# Altium PCB PCB12.PCBDOC
Units mm, origin at the board's own origin, x right, y up, seen from the top; angles counter-clockwise.
Board outline 152.4 x 101.6 mm, 2 copper layers (Top Layer, Bottom Layer); 23 components, 35 nets, 129 pads, 249 vias.
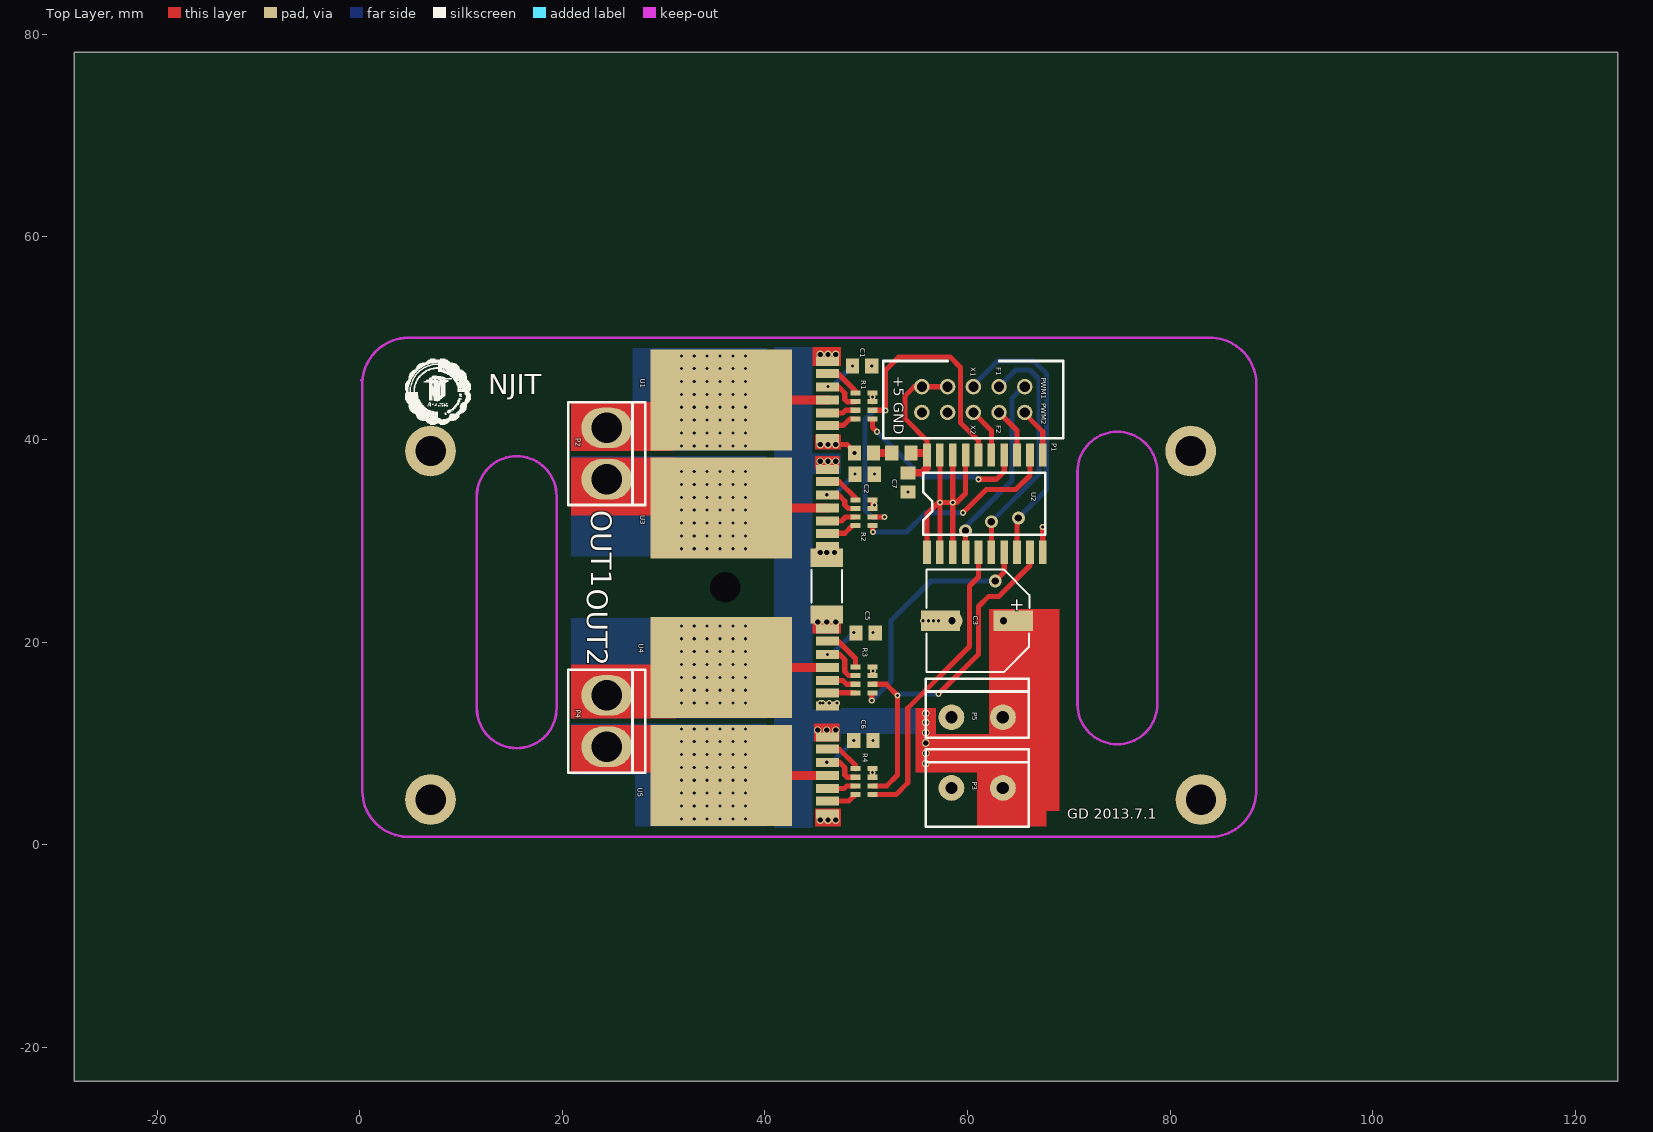
[diagram p0: Top Layer view]
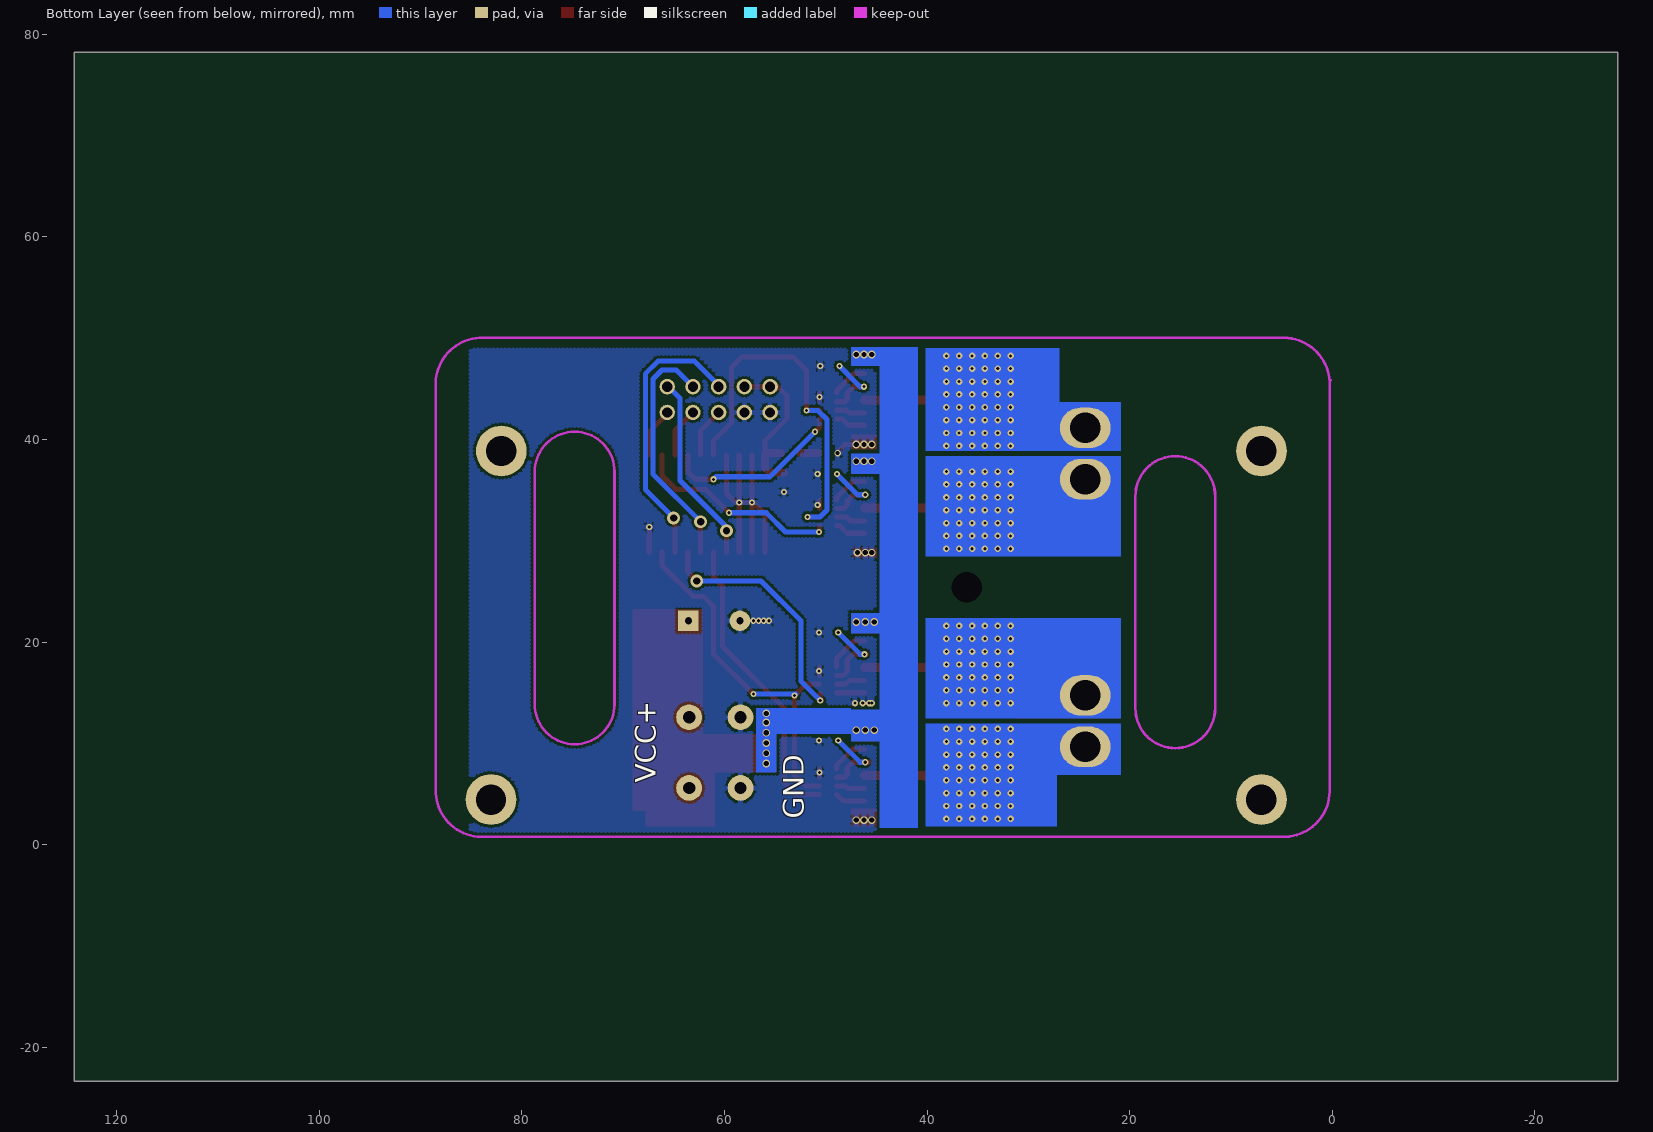
[diagram p1: Bottom Layer view, seen from below]

## Layer stack, top to bottom
Top Layer: signal copper 0.0356
Dielectric: dielectric 0.32, FR-4, Dk 4.8
Bottom Layer: signal copper 0.0356

## Board outline
-28.194,-23.368 124.206,-23.368 124.206,78.232 -28.194,78.232

## Design rules (kind name [scope] priority, off if disabled: settings)
Clearance [All] p1: gap=0.254
ComponentClearance [All] p1: gap=0.254 collisioncheckmode=3 verticalgap=0.254
PolygonConnect [All] p1: connectstyle=Relief reliefconductorwidth=0.508 reliefentries=4 polygonreliefangle="90 Angle"
RoutingVias [All] p1: holewidth=0.711 width=1.27 viastyle="Through Hole" minholewidth=0.305 minwidth=0.61 maxholewidth=12.7 maxwidth=127
SolderMaskExpansion [All] p1: expansion=0.102
TestPointUsage [All] p1: valid=0 allowmultiple=FALSE
Testpoint [All] p1: side=15 testpointundercomponent=TRUE minsize=1.016 maxsize=2.54 preferedsize=1.524 minholesize=0 maxholesize=1.016 preferedholesize=0.813 testpointgrid=0.025 style=1023 order=0-112345678
Width [All] p1: maxlimit=2539.975 minlimit=0.254 preferedwidth=0.508
18 further rules are at their usual default settings.

## Classes and differential pairs
component class motordriver: C1 C2 C3 C4 C5 C6 C7 C? P1 P2 P3 P4 R1 R2 R3 R4 U1 U2 U3 U4 U5

## Components (designator, comment, footprint, x,y, rotation, side; value= is the part's Value field where it differs from the comment)
C1 "104" M0805 50.546,47.244 r180 top
C2 "104" M0805 50.8,36.576 r180 top
C3 "Cap Pol1" C2 60.96,22.098 r90 top
C5 "104" M0805 50.902,20.904 r180 top
C6 "104" M0805 50.673,10.287 r180 top
C7 "104" M0805 54.127,36.703 r270 top
P1 "Header 5X2" ISP 65.659,45.212 r270 top
P2 "Header 2" 2P 24.384,38.608 r270 top
P3 "Header 2" 2p#1 60.96,5.588 r0 top
P4 "Header 2" 2p#2 24.384,12.192 r270 top
P5 "Header 2" 2p#1 60.96,12.573 r0 top (schematic designator P3)
R1 "A" 排阻 49.784,43.307 r90 top
R2 "A" 排阻 49.784,32.766 r90 top
R3 "A" 排阻 49.784,16.256 r90 top
R4 "A" 排阻 49.784,6.223 r90 top
U1 "bts7960" bts7960 41.148,39.624 r270 top
U2 "74ALS244B" 244 61.722,34.671 r0 top
U3 "bts7960" bts7960 41.148,28.956 r270 top
U4 "bts7960" bts7960 41.148,13.208 r270 top
U5 "bts7960" bts7960 41.148,2.54 r270 top
? "Comment" 6332[2512] 46.101,25.527 r270 top
? "Comment" 2012[0805] 49.784,38.659 r0 top
? "Comment" 2012[0805] 53.467,38.659 r0 top

## Footprints (in the part's own frame and the unit in brackets; to place one, negate y for a bottom-side part, rotate by r counter-clockwise, add the part's x,y. Pads: shape width x height; smd on the part's side, far side on the other; paste and mask are expansions set on the pad)
2P [mm]
  oval 4x5 hole 3: 1(-2.54,0) 2(2.54,0)
  silkscreen extent -5.08,-3.81 5.08,3.81
2p#1 [mil]
  round 100 hole 48: 1(-100,0) 2(100,0)
  silkscreen extent -200,-150 200,150
2p#2 [mil]
  oval 157.48x196.85 hole 118.11: 1(-100,0) 2(100,0)
  silkscreen extent -200,-150 200,150
244 [mil]
  rect 30x90 smd: 1(-225,-228.74) 2(-175,-228.74) 3(-125,-228.74) 4(-75,-228.74) 5(-25,-228.74) 6(25,-228.74) 7(75,-228.74) 8(125,-228.74) 9(175,-228.74) 10(225,-228.74) 11(225,150) 12(175,150) 13(125,150) 14(75,150) 15(25,150) 16(-25,150) 17(-75,150) 18(-125,150) 19(-175,150) 20(-225,150)
2012[0805] [mm] "Chip Resistor; Body 2.0 x 1.3 mm (LxW typ)"
  rect 1.3x1.5 smd: 1(-0.95,0) 2(0.95,0)
6332[2512] [mm] "Chip Resistor; Body 6.3 x 3.2 mm (LxW typ)"
  rect 1.8x3.2 smd: 1(-2.8,0) 2(2.8,0)
  silkscreen extent -1.6,-1.5 1.6,1.5
bts7960 [mil]
  rect 35x90 smd: 1(-18.9,198.11) 2(-70.08,198.11) 3(-117.32,198.11) 4(-168.5,198.11) 5(-219.68,198.11) 6(-270.87,198.11) 7(-318.11,198.11)
  rect 393.7x551.18 smd: 8(-168.5,-215.28)
C2 [mil]
  rect 80x80 hole 27.56: 1(0,-102.5)
  rect 80x150 smd: 1(0,-142.5) 2(0,142.5)
  round 80 hole 27.56: 2(0,97.5)
  silkscreen extent -200,-202 200,198
ISP [mil]
  round 60 hole 39.37: 1(0,0) 2(100,0) 3(0,-100) 4(100,-100) 5(0,-200) 6(100,-200) 7(0,-300) 8(100,-300) 9(0,-400) 10(100,-400)
  silkscreen extent -100,-550 200,150
M0805 [mm]
  rect 1.3x1.5 smd: 1(0,0) 2(1.9,0)
排阻 [mm]
  rect 0.5x1 smd: 1(-1.27,-0.847) 2(-1.27,0.847) 3(-0.423,-0.847) 4(-0.423,0.847) 5(0.423,-0.847) 6(0.423,0.847) 7(1.27,-0.847) 8(1.27,0.847)

## Part data
C1 C2 C5 C6 C7: library part Cap, "Capacitor"
C3: "Polarized Capacitor (Radial)"
P1: "Header, 5-Pin, Dual row"
P2 P3 P4 P5: "Header, 2-Pin"
R1 R2 R3 R4: library part R1

## Free pads (board coordinates)
  round 5 hole 3: 0(6.985,38.862) 1(82.042,38.862) 5(6.985,4.445) 6(83.058,4.445)
  round 5 on Top Overlay: 0(36.068,25.4)
  round 0 hole 3: 0(36.068,25.4)
  round 1 on Top Overlay: 0(56.642,31.496)

## Via types
v1: diameter 0.635, hole 0.305, Top Layer to Bottom Layer, 189 vias
v2: diameter 0.61, hole 0.305, Top Layer to Bottom Layer, 28 vias
v3: diameter 0.762, hole 0.508, Top Layer to Bottom Layer, 27 vias
v4: diameter 1.27, hole 0.711, Top Layer to Bottom Layer, 4 vias
v5: diameter 0.635, hole 0.381, Top Layer to Bottom Layer, 1 vias

## Nets (pads, with @x,y where several pads share a name; then routed paths per layer and width w, separated by ;. In a path a pad name is that pad's centre, name@x,y a point inside that pad or via, vN(x,y) a via of type N, cw(c..) or ccw(c..) an arc to the next point about the centre after c; other vN are vias at no path point)
5V: ?.2@54.417,38.659 C7.1 P1.7 P1.9 U2.20 | length 16.2
  Top Layer w0.508: U2.20 56.007,39.878 53.848,42.037 53.848,44.323 54.737,45.212 P1.9 P1.7
  Top Layer w0.762: C7.1 55.499,36.703 56.007,37.211 U2.20 ; ?.2@54.417,38.659 U2.20@55.956,38.659
BAT: ?.2@46.101,22.727 C3.1 P3.2 P5.2 U1.7 U3.7 U4.7 U5.7
  other v3: 55.88,8.001 55.88,9.017 55.88,10.033 55.88,11.049 45.212,11.303 46.101,11.303 46.99,11.303 55.88,12.065 55.88,12.954 45.212,21.971 46.101,21.971 46.99,21.971 45.466,37.846 46.228,37.846 46.99,37.846 45.466,48.387 46.228,48.387 46.99,48.387
ENL1: P1.3 U2.6 | length 24.4
  Top Layer w0.508: U2.6 v4(62.357,31.877)
  Bottom Layer w0.508: v4(62.357,31.877) 67.056,36.576 67.056,45.974 66.167,46.863 64.77,46.863 P1.3 P1.3@62.738,45.212
ENL2: P1.5 U2.8 | length 27.7
  Top Layer w0.508: U2.8 64.897,32.131 v4(65.024,32.258)
  Bottom Layer w0.508: P1.5 60.579,45.339 62.992,47.752 66.548,47.752 67.818,46.482 67.818,35.052 v4(65.024,32.258)
ENL_1: R1.1 U2.14 | length 18
  Top Layer w0.508: R1.1 50.631,41.19 v2(51.054,40.767) ; v2(61.087,36.068) 62.865,36.068 63.627,36.83 U2.14
  Bottom Layer w0.508: v2@51.029,40.792 v2(51.054,40.767) 55.499,36.322 60.833,36.322 v2(61.087,36.068)
ENL_2: R2.1 U2.12 | length 20.5
  Top Layer w0.508: R2.1 50.631,30.903 v2(50.673,30.861) ; v2(59.563,32.766) 61.849,35.052 64.77,35.052 66.167,36.449 U2.12
  Bottom Layer w0.508: v2(50.673,30.861) 53.975,30.861 55.88,32.766 v2(59.563,32.766)
ENR1: P1.4 U2.13 | length 4.9
  Top Layer w0.508: P1.4 64.897,40.894 U2.13
ENR2: P1.6 U2.15 | length 4.9
  Top Layer w0.508: P1.6 62.357,40.894 U2.15
ENR_1: R3.1 U2.7 | length 24.5
  Top Layer w0.508: v2(50.546,14.224) R3.1@50.546,14.901 ; v4(62.738,26.035) 63.627,26.924 U2.7
  Bottom Layer w0.508: v2(50.546,14.224) 52.451,16.129 52.451,22.098 56.388,26.035 v4(62.738,26.035)
ENR_2: R4.1 U2.5 | length 29.6
  Top Layer w0.508: R4.1 52.959,4.953 54.102,6.096 54.102,13.462 60.198,19.558 60.198,25.527 61.087,26.416 U2.5
GND: ?.1@46.101,28.327 ?.1@48.834,38.659 C1.1 C2.1 C3.2 C5.1 C6.1 C7.2 P1.8 P1.10 P3.1 P5.1 R1.5 R1.7 R2.5 R2.7 R3.5 R3.7 R4.5 R4.7 U1.1 U2.1 U2.2 U2.3 U2.10 U2.17 U2.18 U2.19 U3.1 U4.1 U5.1 | length 39.8
  Top Layer w0.508: v3(46.99,39.497) 48.133,39.497 ?.1@48.834,38.796 ; R4.5 v2(50.631,7.112) R4.7 ; R3.5 50.631,17.145 R3.7 ; R2.5 50.631,33.528 R2.7 ; R1.5 v2(50.631,44.196) R1.7 ; U2.1 56.007,32.639 57.15,33.782 v2(57.277,33.782) ; U2.2 v2(57.277,33.782) ; U2.19 v2(57.277,33.782) ; P3.1@58.42,6.35 P3.1@58.42,6.604 ; U2.3 v2(58.547,33.782) ; U2.18 v2(58.547,33.782) ; U2.17 59.817,34.671 58.928,33.782 v2(58.547,33.782) ; U2.10 v2(67.437,31.369) ; v2(57.277,33.782) v2(58.547,33.782)
  other v1: 45.466,13.97 45.72,13.97 46.355,13.97 47.117,13.97 55.626,22.098 56.134,22.098 56.642,22.098 57.15,22.098 50.8,33.528
  other v2: 50.673,10.287 50.673,17.145 50.673,20.955 54.127,34.803 50.8,36.576 50.546,47.244
  other v3: 45.466,2.413 46.228,2.413 46.99,2.413 45.466,28.829 46.101,28.829 46.863,28.829 45.466,39.497 46.228,39.497
  other v5: 48.834,38.659
IN_1: R1.2 U1.2 | length 3
  Top Layer w0.508: U1.2 47.754,41.404 48.387,42.037 R1.2
IN_2: R2.2 U3.2 | length 3.1
  Top Layer w0.508: U3.2 47.881,30.736 48.641,31.496 R2.2
IN_3: R3.2 U4.2 | length 2.8
  Top Layer w0.508: U4.2@46.182,14.986 R3.2
IN_4: R4.2 U5.2 | length 3
  Top Layer w0.508: U5.2 48.304,4.32 R4.2
INH_1: R1.4 U1.3 | length 2.9
  Top Layer w0.508: U1.3 47.684,42.604 47.964,42.884 R1.4
INH_2: R2.4 U3.3 | length 2.9
  Top Layer w0.508: U3.3 47.557,31.936 47.964,32.343 R2.4
INH_3: R3.4 U4.3 | length 2.9
  Top Layer w0.508: U4.3 47.693,16.188 48.048,15.833 R3.4
INH_4: R4.4 U5.3 | length 2.9
  Top Layer w0.508: U5.3 47.811,5.52 48.091,5.8 R4.4
IS_1: R1.8 U1.6 | length 3.7
  Top Layer w0.508: U1.6 47.222,46.504 48.937,44.789 R1.8
IS_2: R2.8 U3.6 | length 3.6
  Top Layer w0.508: U3.6 47.349,35.836 48.937,34.248 R2.8
IS_3: R3.8 U4.6 | length 4.3
  Top Layer w0.508: U4.6 47.222,20.088 48.937,18.373 R3.8
IS_4: R4.8 U5.6 | length 3.8
  Top Layer w0.508: U5.6 47.349,9.42 48.937,7.832 R4.8
OUT1: P2.1 U1.4 U1.8 | length 8.7
  Top Layer w0.889: U1.8@37.592,44.069 37.655,44.005 37.757,43.904 38.1,43.904 U1.4
  other v1: 31.75,39.37 33.02,39.37 34.29,39.37 35.56,39.37 36.83,39.37 38.1,39.37 31.75,40.64 33.02,40.64 34.29,40.64 35.56,40.64 36.83,40.64 38.1,40.64 31.75,41.91 33.02,41.91 34.29,41.91 35.56,41.91 36.83,41.91 38.1,41.91 31.75,43.18 33.02,43.18 34.29,43.18 35.56,43.18 36.83,43.18 38.1,43.18 31.75,44.45 33.02,44.45 34.29,44.45 35.56,44.45 36.83,44.45 38.1,44.45 31.75,45.72 33.02,45.72 34.29,45.72 35.56,45.72 36.83,45.72 38.1,45.72 31.75,46.99 33.02,46.99 34.29,46.99 35.56,46.99 36.83,46.99 38.1,46.99 31.75,48.26 33.02,48.26 34.29,48.26 35.56,48.26 36.83,48.26 38.1,48.26
OUT2: P2.2 U3.4 U3.8 | length 9.4
  Top Layer w0.889: U3.8@36.83,33.401 36.995,33.236 38.1,33.236 U3.4
  other v1: 31.75,29.21 33.02,29.21 34.29,29.21 35.56,29.21 36.83,29.21 38.1,29.21 31.75,30.48 33.02,30.48 34.29,30.48 35.56,30.48 36.83,30.48 38.1,30.48 31.75,31.75 33.02,31.75 34.29,31.75 35.56,31.75 36.83,31.75 38.1,31.75 31.75,33.02 33.02,33.02 34.29,33.02 35.56,33.02 36.83,33.02 38.1,33.02 31.75,34.29 33.02,34.29 34.29,34.29 35.56,34.29 36.83,34.29 38.1,34.29 31.75,35.56 33.02,35.56 34.29,35.56 35.56,35.56 36.83,35.56 38.1,35.56 31.75,36.83 33.02,36.83 34.29,36.83 35.56,36.83 36.83,36.83 38.1,36.83
OUT3: P4.1 U4.4 U4.8 | length 8.8
  Top Layer w0.889: U4.8@37.465,17.272 37.681,17.488 38.1,17.488 U4.4
  other v1: 31.75,13.97 33.02,13.97 34.29,13.97 35.56,13.97 36.83,13.97 38.1,13.97 31.75,15.24 33.02,15.24 34.29,15.24 35.56,15.24 36.83,15.24 38.1,15.24 31.75,16.51 33.02,16.51 34.29,16.51 35.56,16.51 36.83,16.51 38.1,16.51 31.75,17.78 33.02,17.78 34.29,17.78 35.56,17.78 36.83,17.78 38.1,17.78 31.75,19.05 33.02,19.05 34.29,19.05 35.56,19.05 36.83,19.05 38.1,19.05 31.75,20.32 33.02,20.32 34.29,20.32 35.56,20.32 36.83,20.32 38.1,20.32 31.75,21.59 33.02,21.59 34.29,21.59 35.56,21.59 36.83,21.59 38.1,21.59
OUT4: P4.2 U5.4 U5.8 | length 6.1
  Top Layer w0.889: U5.8@40.132,6.731 40.221,6.82 U5.4
  other v1: 31.75,2.54 33.02,2.54 34.29,2.54 35.56,2.54 36.83,2.54 38.1,2.54 31.75,3.81 33.02,3.81 34.29,3.81 35.56,3.81 36.83,3.81 38.1,3.81 31.75,5.08 33.02,5.08 34.29,5.08 35.56,5.08 36.83,5.08 38.1,5.08 31.75,6.35 33.02,6.35 34.29,6.35 35.56,6.35 36.83,6.35 38.1,6.35 31.75,7.62 33.02,7.62 34.29,7.62 35.56,7.62 36.83,7.62 38.1,7.62 31.75,8.89 33.02,8.89 34.29,8.89 35.56,8.89 36.83,8.89 38.1,8.89 31.75,10.16 33.02,10.16 34.29,10.16 35.56,10.16 36.83,10.16 38.1,10.16 31.75,11.43 33.02,11.43 34.29,11.43 35.56,11.43 36.83,11.43 38.1,11.43
PWM1: P1.1 U2.4 | length 18.8
  Top Layer w0.508: U2.4 v4(59.817,30.988)
  Bottom Layer w0.508: v4(59.817,30.988) 59.817,31.369 64.389,35.941 64.389,44.069 65.532,45.212 P1.1
PWM2: P1.2 U2.11 | length 4.9
  Top Layer w0.508: P1.2 65.659,42.545 67.437,40.767 U2.11
PWM_1: R1.3 R2.3 U2.16 | length 37.7
  Top Layer w0.508: R2.3 v2@51.799,32.343 ; R1.3 v2@51.909,42.884 ; v2(51.918,42.875) 51.918,46.838 53.213,48.133 58.293,48.133 59.309,47.117 59.309,41.656 61.087,39.878 U2.16
  Bottom Layer w0.508: v2(51.816,32.36) 50.571,32.36 49.886,33.045 49.886,41.961 50.8,42.875 v2(51.918,42.875)
PWM_2: R3.3 R4.3 U2.9 | length 36.2
  Top Layer w0.508: R4.3 52.028,5.8 53.086,6.858 v2(53.086,14.732) 51.985,15.833 R3.3 ; v2(57.15,14.859) 61.087,18.796 61.087,23.495 62.103,24.511 63.119,24.511 66.167,27.559 U2.9
  Bottom Layer w0.508: v2@52.959,14.859 53.086,14.859 v2(57.15,14.859)
SR_1: C1.2 R1.6 U1.5 | length 7
  Top Layer w0.508: U1.5 46.228,45.204 47.252,45.204 47.879,44.577 47.879,43.942 48.091,43.73 R1.6
  Bottom Layer w0.508: v2(46.228,45.212) 46.614,45.212 v2(48.646,47.244)
SR_2: C2.2 R2.6 U3.5 | length 7.2
  Top Layer w0.508: U3.5 47.252,34.536 47.879,33.909 47.879,33.528 48.218,33.189 R2.6
  Bottom Layer w0.508: v2(46.101,34.544) 46.868,34.544 v2(48.9,36.576)
SR_3: C5.2 R3.6 U4.5 | length 8
  Top Layer w0.508: U4.5@45.974,18.796 46.18,18.796 47.371,18.796 47.879,18.288 47.879,17.08 48.279,16.679 R3.6
  Bottom Layer w0.508: v2(46.18,18.788) 46.601,18.788 v2(48.768,20.955)
SR_4: C6.2 R4.6 U5.5 | length 7.8
  Top Layer w0.508: U5.5@45.72,8.128 v2(46.101,8.128) 46.18,8.128 47.371,8.128 47.879,7.62 47.879,6.858 48.091,6.646 R4.6
  Bottom Layer w0.508: v2(46.101,8.128) 46.609,8.128 v2(48.768,10.287)
pads on no net: ?.1@52.517,38.659 ?.2@50.734,38.659
copper on no net: | length 1.8
  Top Layer w0.762: 50.734,38.659 52.517,38.659

## Polygon pours and split planes (outlines as drawn)
GND on Bottom Layer "Top Layer-No Net" (hatched 90Degree grid 0 track 0.381, remove dead copper, pour order 1000): 85.09,48.893 21.717,48.893 21.717,0.633 85.09,0.633 85.09,48.893

## Keep-outs
Keep-Out Layer:
  lines w0.25: 0.127,45.847 0.254,45.72 0.254,42.926 0.254,5.207 ; 4.572,0.762 83.947,0.762 ; 5.08,50.038 84.201,50.038 ; 11.557,13.462 11.557,34.417 ; 19.431,13.462 19.431,34.417 ; 70.866,13.843 70.866,36.83 ; 78.74,13.97 78.74,36.83 ; 88.519,5.08 88.519,43.307 88.519,45.212
  lines w0.254: 0.254,5.588 ccw(c4.826,5.334) 4.572,0.762 ; 0.254,45.72 cw(c4.826,45.466) 5.08,50.038 ; 11.557,13.462 ccw(c15.494,13.462) 19.431,13.462 ; 11.557,34.417 cw(c15.494,34.417) 19.431,34.417 ; 70.866,13.843 ccw(c74.803,13.843) 78.74,13.843 ; 70.866,36.83 cw(c74.803,36.83) 78.74,36.83 ; 83.693,0.762 ccw(c83.947,5.334) 88.519,5.08 ; 84.201,50.038 cw(c83.947,45.466) 88.519,45.212

## Other copper
Top Layer:
  region net BAT: 60.96,7.62 60.96,1.778 67.818,1.778 67.818,7.62
  region net BAT: 44.704,49.149 44.704,47.244 47.498,47.244 47.498,49.149
  region net BAT: 54.864,13.462 54.864,7.112 56.896,7.112 56.896,13.462
  region net BAT: 54.864,10.922 54.864,7.112 64.77,7.112 64.77,10.922
  region net OUT4: 20.828,11.811 20.828,7.112 29.464,7.112 29.464,11.811
  region net OUT3: 20.828,17.78 20.828,12.446 31.242,12.446 31.242,17.78
  region net OUT2: 20.828,38.227 20.828,32.512 31.242,32.512 31.242,38.227
  region net OUT1: 20.828,43.688 20.828,38.862 30.988,38.862 30.988,43.688
  region net BAT: 62.103,23.241 62.103,3.302 69.088,3.302 69.088,23.241
  region net GND: 44.958,40.513 44.958,38.989 47.498,38.989 47.498,40.513
  region net BAT: 44.958,38.354 44.958,37.084 47.371,37.084 47.371,38.354
  region net GND: 44.958,29.337 44.958,28.321 47.371,28.321 47.371,29.337
  region net BAT: 44.704,22.86 44.704,20.828 47.498,20.828 47.498,22.86
  region net BAT: 44.831,11.938 44.831,10.16 47.371,10.16 47.371,11.938
  region net GND: 44.958,3.556 44.958,1.778 47.498,1.778 47.498,3.556
Bottom Layer:
  region net OUT4: 20.828,11.938 20.828,6.858 28.448,6.858 28.448,11.938
  region net OUT1: 20.828,43.688 20.828,38.862 29.464,38.862 29.464,43.688
  region net BAT: 54.864,13.462 54.864,7.112 56.896,7.112 56.896,13.462
  region net BAT: 47.498,13.462 47.498,10.922 56.896,10.922 56.896,13.462
  region net BAT: 43.18,13.335 43.18,10.16 47.498,10.16 47.498,13.335
  region net BAT: 43.688,22.86 43.688,20.828 47.498,20.828 47.498,22.86
  region net BAT: 43.942,38.608 43.942,36.576 47.498,36.576 47.498,38.608
  region net BAT: 43.434,49.149 43.434,47.244 47.498,47.244 47.498,49.149
  region net OUT1: 26.924,49.022 26.924,38.862 40.132,38.862 40.132,49.022
  region net OUT2: 20.828,38.354 20.828,28.448 40.132,28.448 40.132,38.354
  region net OUT3: 20.828,22.352 20.828,12.446 40.132,12.446 40.132,22.352
  region net OUT4: 27.178,11.938 27.178,1.778 40.132,1.778 40.132,11.938
  region net BAT: 40.894,49.149 40.894,1.651 44.704,1.651 44.704,49.149

## Silkscreen, mask and mechanical layers (free items; w line width, h text height)
Top Overlay:
  drawing of 1591 lines, arcs and shapes, not listed
  text "X1" at 60.325,47.117 h0.51 r270
  text "F1" at 62.865,47.117 h0.51 r270
  text "+5" at 52.705,46.228 h1.02 r270
  text "PWM1" at 67.31,46.101 h0.51 r270
  text "NJIT" at 12.7,44.45 h2
  text "GND" at 52.705,43.688 h1.02 r270
  text "PWM2" at 67.31,43.561 h0.51 r270
  text "X2" at 60.325,41.402 h0.51 r270
  text "F2" at 62.865,41.402 h0.51 r270
  text "OUT1" at 22.86,33.02 h2.03 r270
  text "OUT2" at 22.479,25.273 h2.03 r270
  text "GD 2013.7.1" at 69.85,2.54 h1
Bottom Overlay:
  text "VCC+" at 66.802,6.096 h2.03 r270
  text "GND" at 52.197,2.54 h2.03 r270
Top Solder:
  region: 56.515,5.969 56.515,2.54 60.071,2.54 60.071,5.969
  region: 61.595,9.779 61.595,2.159 65.278,2.159 65.278,9.779
  lines w1.27: 55.88,8.001 55.88,12.446 ; 55.88,9.144 63.5,9.144
Bottom Solder:
  region: 31.242,48.768 31.242,38.862 38.608,38.862 38.608,48.768
  region: 31.242,37.338 31.242,28.702 38.608,28.702 38.608,37.338
  region: 31.242,22.098 31.242,13.462 38.608,13.462 38.608,22.098
  region: 31.242,11.938 31.242,2.032 38.608,2.032 38.608,11.938
  lines w1.27: 42.926,2.794 42.926,47.752 43.561,48.387 46.99,48.387 ; 42.926,37.846 46.99,37.846 ; 43.053,21.971 46.99,21.971 ; 43.688,12.192 55.753,12.192 55.88,12.065 55.88,8.001

## Text inside footprints (layer, text, board x,y; h text height)
C3: Top Overlay "+" at 65.468,24.384 h1.27 r90